# Altium PCB PCB1.PcbDoc
Units mm, origin at the board's own origin, x right, y up, seen from the top; angles counter-clockwise.
Board outline 92.96 x 68.33 mm, 4 copper layers (Top Layer, GND_PLANE, PWR_PLANE, Bottom Layer), stack 1.5 mm thick; 71 components, 41 nets, 249 pads, 0 vias.
Unrouted connection lines stored in the file: 160.
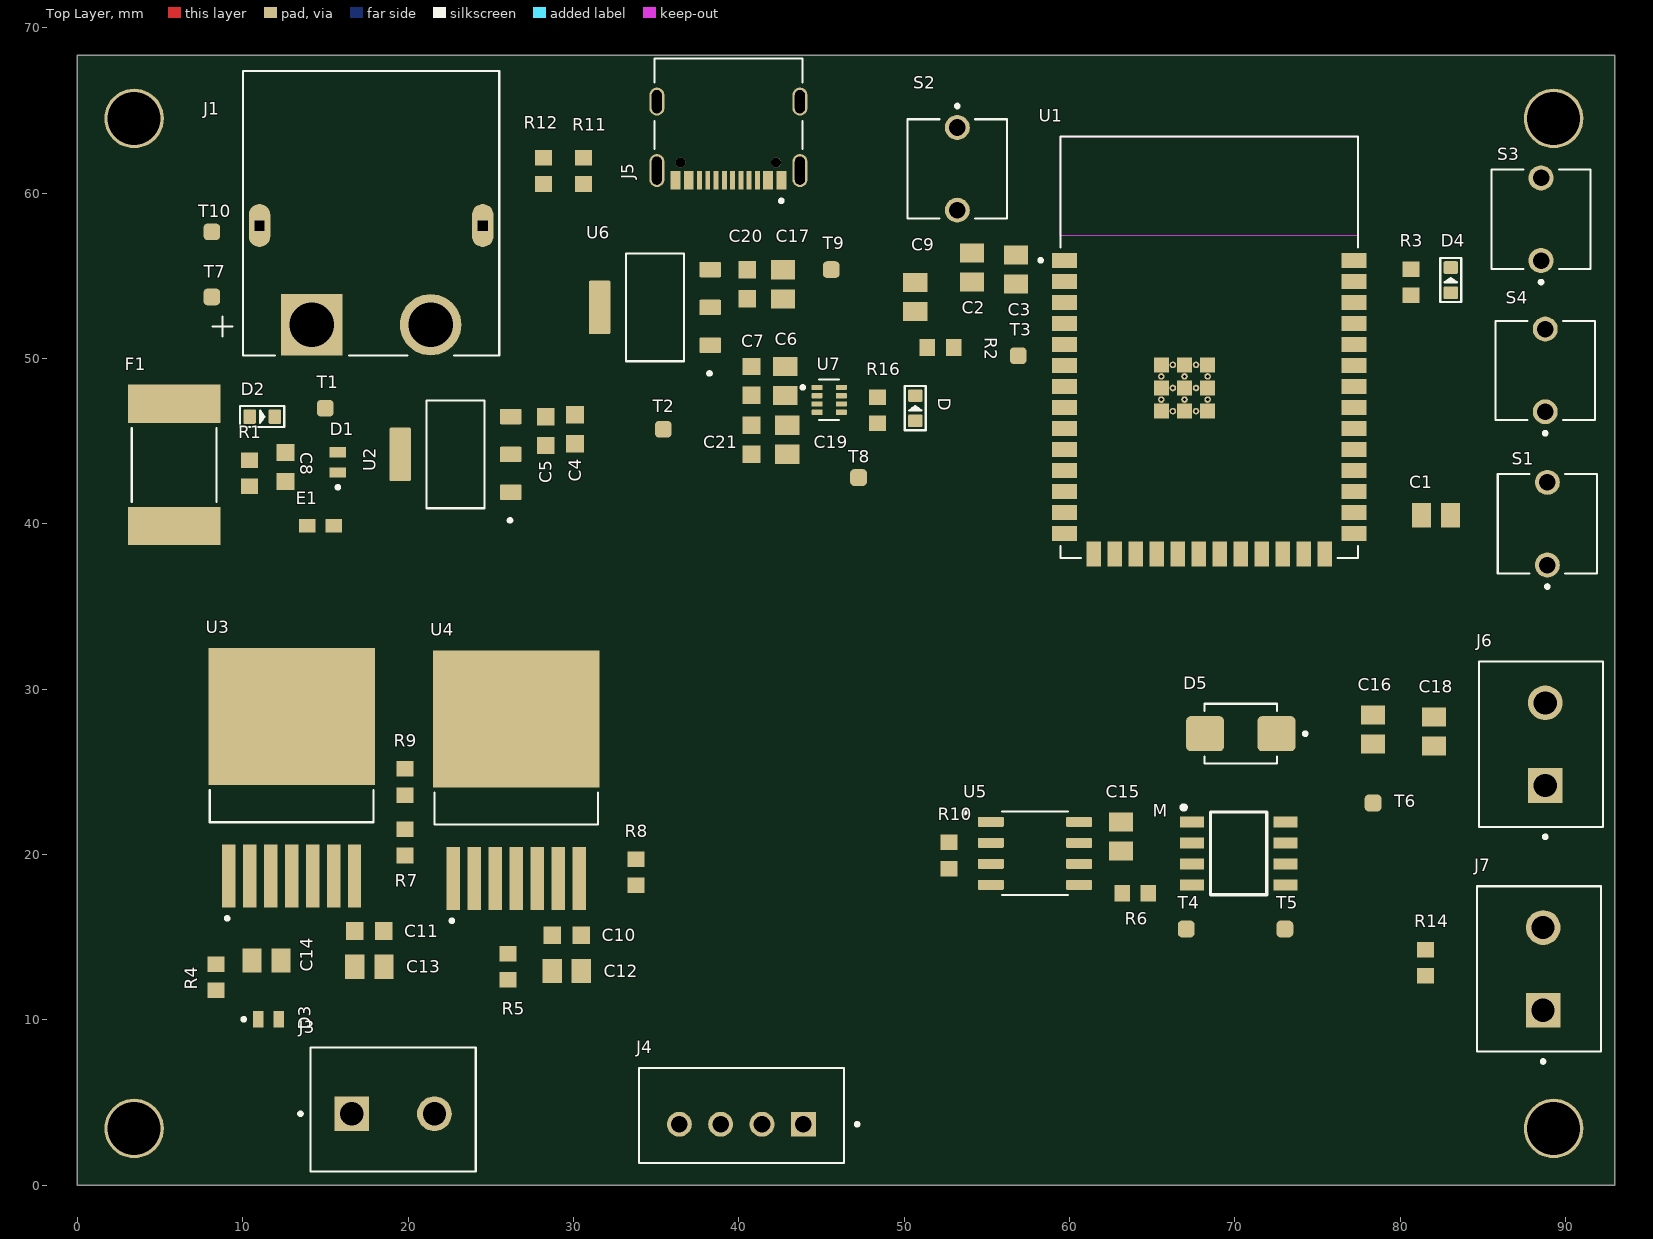
[diagram p0: Top Layer view]
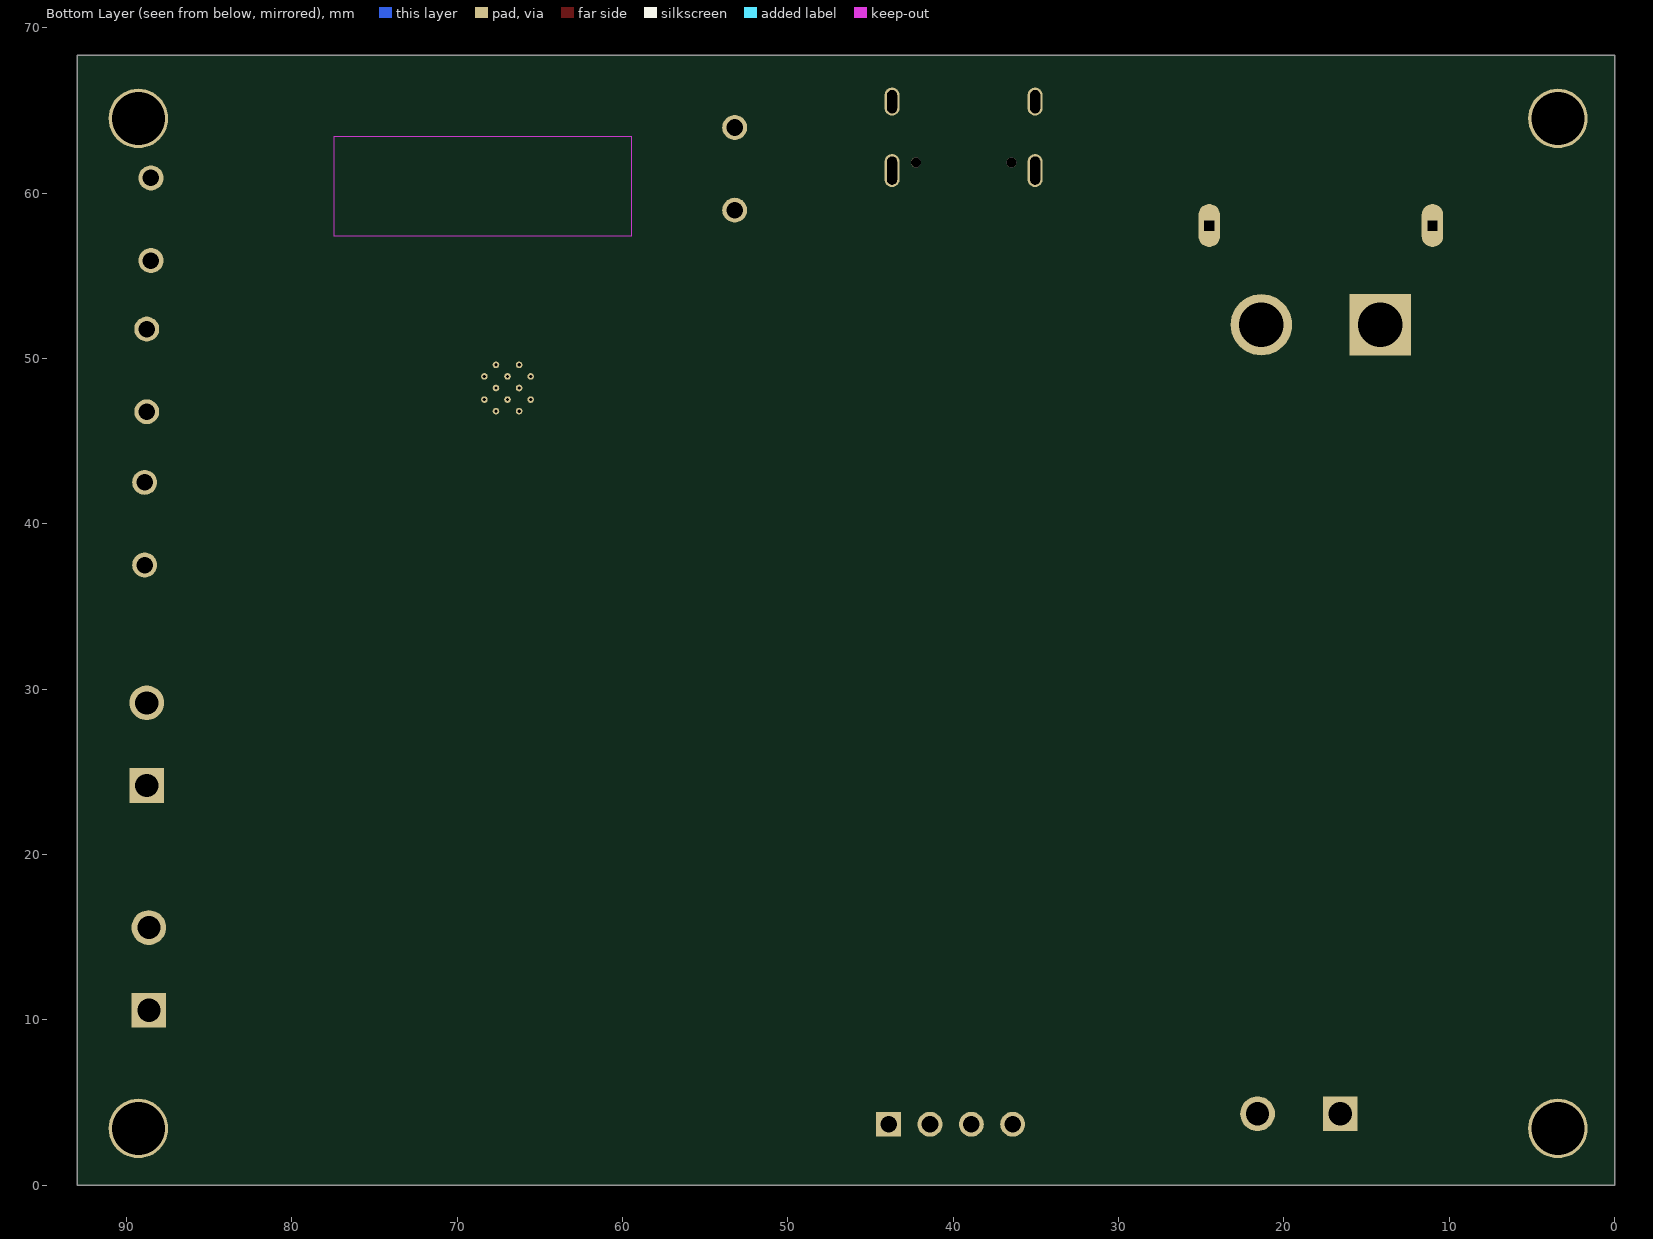
[diagram p1: Bottom Layer view, seen from below]
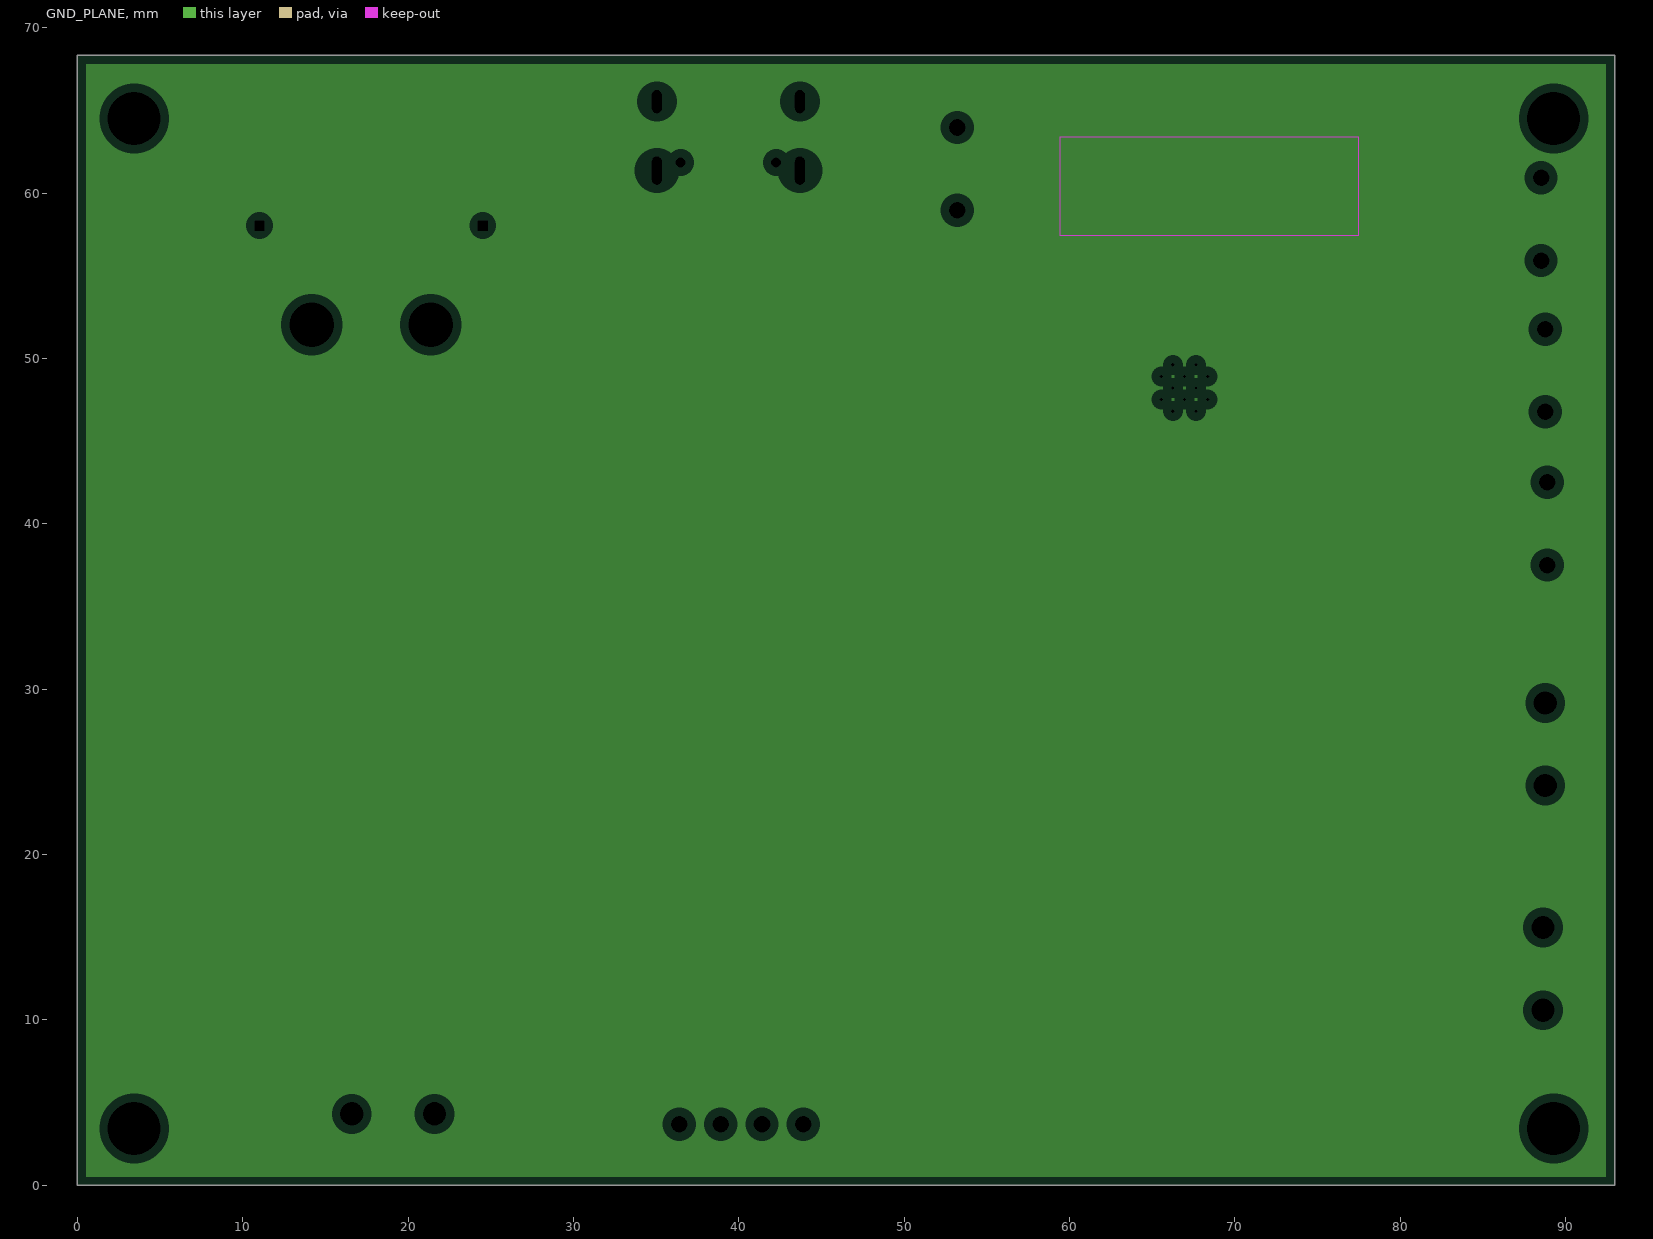
[diagram p2: GND_PLANE, clearances drawn from the general rule]
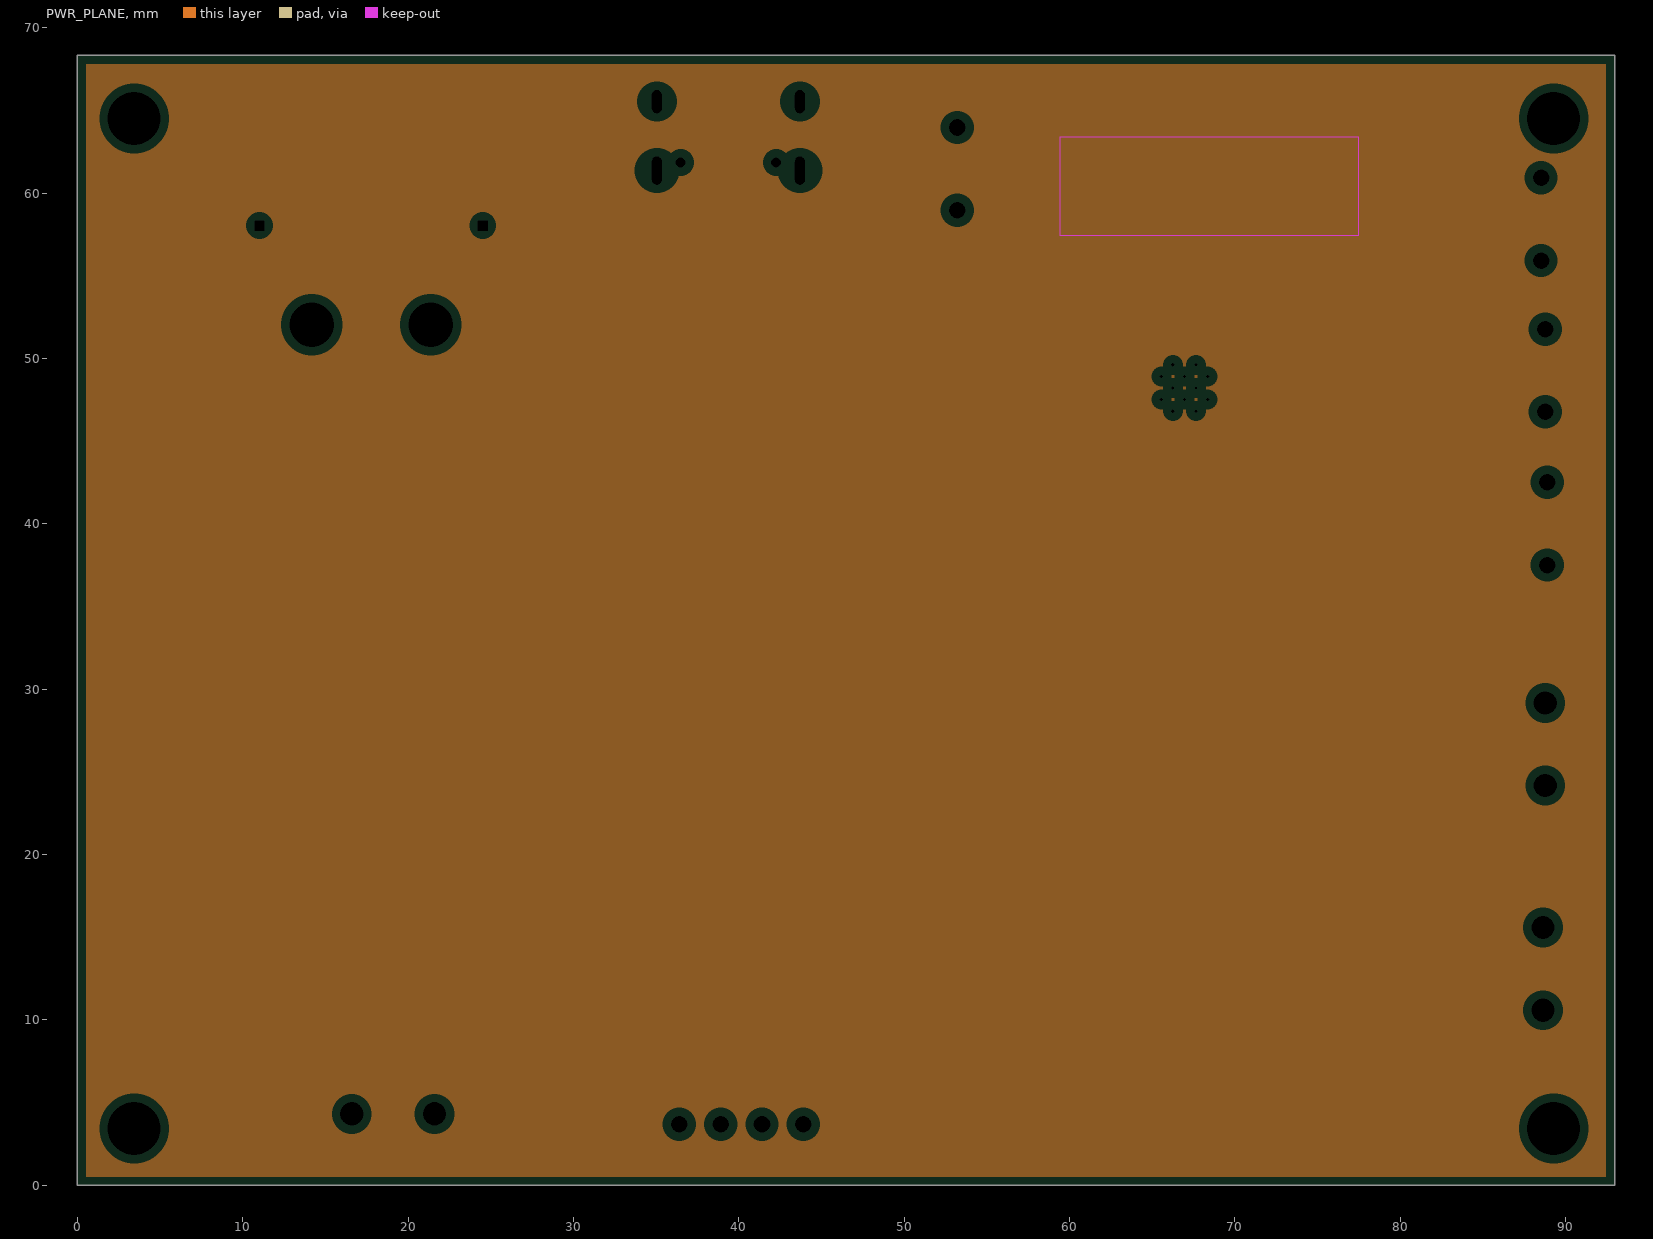
[diagram p3: PWR_PLANE, clearances drawn from the general rule]

## Layer stack, top to bottom
Top Solder: solder mask 0.0102, Solder Resist, Dk 3.5
Top Layer: signal copper 0.035
Dielectric 1: prepreg 0.18, PP-006, Dk 4.1
GND_PLANE: plane copper 0.035
Dielectric: core 1, FR-4, Dk 4.5
PWR_PLANE: plane copper 0.035
Dielectric 2: prepreg 0.18, PP-006, Dk 4.1
Bottom Layer: signal copper 0.035
Bottom Solder: solder mask 0.0102, Solder Resist, Dk 3.5

## Board outline
0,0 92.964,0 92.964,68.326 0,68.326

## Design rules (kind name [scope] priority, off if disabled: settings)
Clearance CLR_USB [InNetClass('USB_DIFF')] p1: gap=0.15 ignorepadtopadclearanceinfootprint=FALSE
Clearance CLR_RF [InNetClass('ANALOG_RF')] p2: gap=0.3 ignorepadtopadclearanceinfootprint=FALSE
Clearance CLR_HIGH_CURRENT [InNetClass('HIGH_CURRENT')] p3: gap=0.5 ignorepadtopadclearanceinfootprint=FALSE
Clearance CLR_GLOBAL [All] p4: gap=0.15 ignorepadtopadclearanceinfootprint=FALSE
DiffPairsRouting [InDifferentialPair('USB_D')] p1: maxlimit=0.254 minlimit=0.1 mostfreqgap=0.16 toplayer_minwidth=0.1 toplayer_maxwidth=0.381 toplayer_prefwidth=0.18 bottomlayer_minwidth=0.1 bottomlayer_maxwidth=0.381 bottomlayer_prefwidth=0.18 maxuncoupledlength=3
HoleSize [All] p1: absolutevalues=TRUE maxlimit=2.54 minlimit=0.2 maxpercent=80.000 minpercent=20.000
MatchedLengths USB_MATCH [InDifferentialPair('USB_D')] p1: tolerance=0.5 checknetsindiffpair=FALSE checkdiffpairvsdiffpair=TRUE checkxsignals=TRUE checkothers=TRUE
PlaneClearance [All] p1: clearance=0.508
PlaneConnect [All] p1: planeconnectstyle=Relief reliefexpansion=0.508 reliefentries=4 reliefconductorwidth=0.254 reliefairgap=0.254
PolygonConnect POWER_3V3_PGN [InNetClass('POWER_3V3')] p1: connectstyle=Relief reliefconductorwidth=0.254 reliefentries=4 polygonreliefangle="90 Angle" airgapwidth=0.254
PolygonConnect HIGH_CURRENT_PGN [InNetClass('HIGH_CURRENT')] p2: connectstyle=Direct reliefconductorwidth=0.254 reliefentries=4 polygonreliefangle="90 Angle" airgapwidth=0.254
RoutingVias RF_VIA [InNetClass('ANALOG_RF')] p1: holewidth=0.25 width=0.5 viastyle="Through Hole" minholewidth=0.2 minwidth=0.4 maxholewidth=0.35 maxwidth=0.7
RoutingVias POWER_VIA [InNetClass('HIGH_CURRENT')] p2: holewidth=0.4 width=0.8 viastyle="Through Hole" minholewidth=0.35 minwidth=0.65 maxholewidth=0.6 maxwidth=1
RoutingVias SIGNAL_VIA [All] p3: holewidth=0.2 width=0.45 viastyle="Through Hole" minholewidth=0.15 minwidth=0.4 maxholewidth=0.35 maxwidth=0.7
SilkToSolderMaskClearance [IsPad] p1: minsilkscreentomaskgap=0.2 clearancetoexposedcopper=TRUE
SolderMaskExpansion [All] p1: expansion=0.102 istentingtop=FALSE
SupplyNets "Schematic Supply Nets_4" [InNet('+12V_MAIN')] p1: voltage=0.000
SupplyNets "Schematic Supply Nets_3" [InNet('3V3_USB')] p2: voltage=0.000
SupplyNets "Schematic Supply Nets_2" [InNet('3V3')] p3: voltage=0.000
SupplyNets "Schematic Supply Nets_1" [InNet('GND')] p4: voltage=0.000
SupplyNets "Schematic Supply Nets" [InNet('3V3_BAT')] p5: voltage=0.000
UnpouredPolygon [InNetClass('All Nets')] p1:
Width USB_DIFF_WIDTH [InNetClass('USB_DIFF')] p1: maxlimit=0.22 minlimit=0.16 preferedwidth=0.18
Width ANALOG_RF_WIDTH [InNetClass('ANALOG_RF')] p2: maxlimit=0.6 minlimit=0.25 preferedwidth=0.35
Width DIGITAL_IO_WIDTH [InNetClass('DIGITAL_IO')] p3: maxlimit=0.4 minlimit=0.15 preferedwidth=0.2
Width CONTROL_PWM_WIDTH [InNetClass('CONTROL_PWM')] p4: maxlimit=0.5 minlimit=0.2 preferedwidth=0.254
Width POWER_3V3_WIDTH [InNetClass('POWER_3V3')] p5: maxlimit=1.2 minlimit=0.4 preferedwidth=0.8
Width WIDTH_HIGH_CURRENT [InNetClass('HIGH_CURRENT')] p6: maxlimit=10 minlimit=2.5 preferedwidth=4
24 further rules are at their usual default settings.

## Classes and differential pairs
differential pair USB_D: +USB_D_P -USB_D_N

## Components (designator, comment, footprint, x,y, rotation, side; value= is the part's Value field where it differs from the comment)
C1 "100nF" SMD_Ceramic_CAP 82.169,40.513 r180 top
C2 "100nF" SMD_Ceramic_CAP 54.102,55.499 r270 top
C3 "100nF" SMD_Ceramic_CAP 56.769,55.381 r270 top
C4 "10uF" Capacitor_Bipolar-SMD 30.099,45.72 r270 top
C5 "470uF" Capacitor_Bipolar-SMD 28.321,45.607 r270 top
C6 "100nF" SMD_Ceramic_CAP 42.799,48.641 r270 top
C7 "10uF" Capacitor_Bipolar-SMD 40.767,48.641 r90 top
C8 "100uF" Capacitor_Bipolar-SMD 12.573,43.434 r90 top
C9 "100nF" SMD_Ceramic_CAP 50.673,53.721 r270 top
C10 "1000uF" Capacitor_Bipolar-SMD 29.591,15.113 r180 top
C11 "1000uF" Capacitor_Bipolar-SMD 17.653,15.367 r0 top
C12 "100nF" SMD_Ceramic_CAP 29.591,12.954 r180 top
C13 "100nF" SMD_Ceramic_CAP 17.653,13.208 r0 top
C14 "100nF" SMD_Ceramic_CAP 11.43,13.589 r0 top
C15 "100nF" SMD_Ceramic_CAP 63.119,21.082 r90 top
C16 "100pF" SMD_Ceramic_CAP 78.359,27.559 r90 top
C17 "100nF" SMD_Ceramic_CAP 42.672,54.483 r90 top
C18 "10nF" SMD_Ceramic_CAP 82.042,27.441 r270 top
C19 "100nF" SMD_Ceramic_CAP 42.926,45.085 r90 top
C20 "10uF" Capacitor_Bipolar-SMD 40.513,54.483 r270 top
C21 "10uF" Capacitor_Bipolar-SMD 40.767,45.085 r270 top
D "PWR_ST" LED-0603 50.673,46.99 r90 top
D1 "TVS_15V" TVS_15V 15.748,43.71 r90 top
D2 "BAT_STATUS" LED-0603 11.176,46.482 r0 top
D3 "TVS_15V" TVS_15V 11.557,10.033 r0 top
D4 "LED1_Status" LED-0603 83.058,54.737 r90 top
D5 "SS24" SS24 70.358,27.305 r180 top
E1 "Ferrite_Bead" Ferrite_bead 14.694,39.878 r0 top
F1 "Polyfuse" Polyfuse 5.842,43.561 r90 top
J1 "XT60PW-F" XT60PW-F 17.761,52.039 r180 top
J3 "LF Coil Connector" 2_Pin_Terminal_Block 19.09,4.318 r0 top
J4 "UART2" JST_XH_Balance 40.152,4.208 r0 top
J5 "TYPE-C-31-M-12" HRO_TYPE-C-31-M-12 39.37,65.532 r180 top
J6 "Antenna" 2_Pin_Terminal_Block 88.773,26.67 r90 top
J7 "HF_OUT" 2_Pin_Terminal_Block 88.646,13.081 r90 top
M "IRF7470" IRF7470 70.231,20.066 r0 top
R1 "1k" Resistor_SMD 10.414,43.053 r90 top
R2 "10k" Resistor_SMD 52.197,50.673 r180 top
R3 "220" Resistor_SMD 80.645,54.61 r90 top
R4 "10" Resistor_SMD 8.382,12.573 r90 top
R5 "10k" Resistor_SMD 26.035,13.208 r90 top
R6 "10" Resistor_SMD 63.98,17.653 r0 top
R7 "1k" Resistor_SMD 19.812,20.729 r90 top
R8 "1k" Resistor_SMD 33.782,18.923 r90 top
R9 "10k" Resistor_SMD 19.812,24.384 r90 top
R10 "100" Resistor_SMD 52.705,19.939 r90 top
R11 "5.1k" Resistor_SMD 30.607,61.341 r270 top
R12 "5.1k" Resistor_SMD 28.194,61.341 r270 top
R14 "10" Resistor_SMD 81.534,13.462 r270 top
R16 "1k" Resistor_SMD 48.387,46.863 r270 top
S1 "SW1" SW_BUTT-2 88.9,40.005 r90 top
S2 "SW2" SW_BUTT-2 53.213,61.468 r270 top
S3 "BUTT-2" SW_BUTT-2 88.519,58.42 r90 top
S4 "BUTT-2" SW_BUTT-2 88.773,49.276 r90 top
T1 "Test_Point" Test_Point 14.986,46.101 r0 top
T2 "Test_Point" Test_Point 35.433,44.831 r0 top
T3 "Test_Point" Test_Point 56.896,49.276 r0 top
T4 "Test_Point" Test_Point 67.056,14.605 r0 top
T5 "Test_Point" Test_Point 73.025,14.605 r0 top
T6 "Test_Point" Test_Point 78.359,22.225 r0 top
T7 "Test_Point" Test_Point 8.128,52.832 r0 top
T8 "Test_Point" Test_Point 47.244,41.91 r0 top
T9 "Test_Point" Test_Point 45.593,54.483 r0 top
T10 "Test_Point" Test_Point 9.017,57.658 r90 top
U1 "ESP32-S3-WROOM-1-N16R2" ESP32-S3-WROOM-1-N16R2 68.453,50.673 r0 top
U2 "AMS1117-3.3" AMS1117-5.0 22.86,44.196 r90 top
U3 "BTS7960B" BTS7960B 12.954,24.638 r90 top
U4 "BTS7960B" BTS7960B 26.543,24.492 r90 top
U5 "TC4420COA" TC4420COA 57.912,20.066 r0 top
U6 "AMS1117-3.3" AMS1117-5.0 34.925,53.086 r90 top
U7 "TPS2116DRLR" TPS2116 45.466,47.498 r0 top

## Footprints (in the part's own frame and the unit in brackets; to place one, negate y for a bottom-side part, rotate by r counter-clockwise, add the part's x,y. Pads: shape width x height; smd on the part's side, far side on the other; paste and mask are expansions set on the pad)
2_Pin_Terminal_Block [mm]
  rect 2.1x2.1 / inner round 2.1 / far side rect 2.1x2.1 hole 1.4: 1(-2.5,0)
  round 2.1 hole 1.4: 2(2.5,0)
  silkscreen extent -5.7,-3.5 5,4, body extent -5.6,-3.75 5,3.75, height 10
AMS1117-5.0 [mm]
  rrect15% 0.93x1.31 smd: 1(-2.29,-3.345) 2(0,-3.345) 3(2.29,-3.345)
  rrect15% 3.24x1.31 smd: 4(0,3.345)
  silkscreen extent -4.09,-3.4 3.25,1.75, body extent -3.25,-3.5 3.25,3.5, height 1.8
BTS7960B [mm]
  rect 3.81x0.8 smd: 1(-5.95,3.81) 2(-5.95,2.54) 3(-5.95,1.27) 4(-5.95,0) 5(-5.95,-1.27) 6(-5.95,-2.54) 7(-5.95,-3.81)
  rect 8.29x10.07 smd paste-6: 8(3.71,0)
  silkscreen extent -8.6,-4.95 -0.75,4.95, body extent -7.45,-4.95 7.45,4.95, height 4.4
Capacitor_Bipolar-SMD [mm]
  rect 1.05x1.08 smd: 1(-0.875,0) 2(0.875,0)
ESP32-S3-WROOM-1-N16R2 [mm]
  rect 1.5x0.9 smd: 2(-8.75,3.99) 3(-8.75,2.72) 4(-8.75,1.45) 5(-8.75,0.18) 6(-8.75,-1.09) 7(-8.75,-2.36) 8(-8.75,-3.63) 9(-8.75,-4.9) 10(-8.75,-6.17) 11(-8.75,-7.44) 12(-8.75,-8.71) 13(-8.75,-9.98) 14(-8.75,-11.25) 27(8.75,-11.25) 28(8.75,-9.98) 29(8.75,-8.71) 30(8.75,-7.44) 31(8.75,-6.17) 32(8.75,-4.9) 33(8.75,-3.63) 34(8.75,-2.36) 35(8.75,-1.09) 36(8.75,0.18) 37(8.75,1.45) 38(8.75,2.72) 39(8.75,3.99) GND(-8.75,5.26) GND(8.75,5.26)
  rect 0.9x1.5 smd: 15(-6.985,-12.5) 16(-5.715,-12.5) 17(-4.445,-12.5) 18(-3.175,-12.5) 19(-1.905,-12.5) 20(-0.635,-12.5) 21(0.635,-12.5) 22(1.905,-12.5) 23(3.175,-12.5) 24(4.445,-12.5) 25(5.715,-12.5) 26(6.985,-12.5)
  round 0.4 hole 0.2 mask+0: 41_10(-1.5,-1.76) 41_11(-2.9,-1.76) 41_12(-0.1,-1.76) 41_13(-2.9,-3.16) 41_14(-1.5,-3.16) 41_15(-0.1,-3.16) 41_16(-2.2,-1.06) 41_17(-0.8,-1.06) 41_18(-2.2,-2.46) 41_19(-0.8,-2.46) 41_20(-2.2,-3.86) 41_21(-0.8,-3.86)
  rect 0.9x0.9 smd: GND(-2.9,-3.86) GND(-2.9,-2.46) GND(-2.9,-1.06) GND(-1.5,-3.86) GND(-1.5,-2.46) GND(-1.5,-1.06) GND(-0.1,-3.86) GND(-0.1,-2.46) GND(-0.1,-1.06)
  Keep-Out Layer region: 9,6.75 -9,6.75 -9,12.75 9,12.75
  Keep-Out Layer region: 9,6.75 -9,6.75 -9,12.75 9,12.75
  silkscreen extent -10.3,-12.75 9,12.75, body extent -9,-12.75 9,12.75, height 3.25
Ferrite_bead [mm]
  rect 1x0.8 smd: 1(-0.8,0) 2(0.8,0)
  body extent -0.8,-0.4 0.8,0.4, height 0.95
HRO_TYPE-C-31-M-12 [mm]
  rect 0.6x1.14 smd mask+0.05: A1_B12(-3.2,4.75) A4_B9(-2.4,4.75) B1_A12(3.2,4.75) B4_A9(2.4,4.75)
  rect 0.3x1.14 smd mask+0.05: A5(-1.25,4.75) A6(-0.25,4.75) A7(0.25,4.75) A8(1.25,4.75) B5(1.75,4.75) B6(0.75,4.75) B7(-0.75,4.75) B8(-1.75,4.75)
  oval 0.9x2 hole 0.6 slot 1.7 at 90 deg: S1(-4.325,4.17) S2(4.325,4.17)
  oval 0.9x1.7 hole 0.6 slot 1.4 at 90 deg: S3(-4.325,0) S4(4.325,0)
  round 0.6 hole 0.6 unplated: ""(-2.89,3.68) ""(2.89,3.68)
  silkscreen extent -4.47,-2.6 4.47,6.1, body extent -4.47,-2.6 4.47,5.31, height 3.31
IRF7470 [mm]
  rect 1.45x0.65 smd paste+0 mask+0.102: 1(-2.825,1.905) 2(-2.825,0.635) 3(-2.825,-0.635) 4(-2.825,-1.905) 5(2.825,-1.905) 6(2.825,-0.635) 7(2.825,0.635) 8(2.825,1.905)
  silkscreen extent -3.45,-2.5 1.7,2.9
JST_XH_Balance [mm]
  rect 1.508x1.508 / inner round 1.508 / far side rect 1.508x1.508 hole 1: 1(3.75,-0.525)
  round 1.508 hole 1: 2(1.25,-0.525) 3(-1.25,-0.525) 4(-3.75,-0.525)
  silkscreen extent -6.2,-2.88 7.1,2.88, body extent -6.2,-2.88 6.2,2.88, height 7
LED-0603 [mil]
  rrect25% 30x35 smd: NEG(30,0) POS(-30,0)
  silkscreen extent -52,-25 52,25
Polyfuse [mm]
  rect 2.3x5.6 smd paste+0 mask+0.102: 1(-3.7,0) 2(3.7,0)
  silkscreen extent -2.23,-2.56 2.23,2.56
Resistor_SMD [mm]
  rect 0.94x1.02 smd: 1(-0.79,0) 2(0.79,0)
  body extent -0.8,-0.4 0.8,0.4, height 0.5
SMD_Ceramic_CAP [mm]
  rect 1.16x1.47 smd: 1(-0.88,0) 2(0.88,0)
  body extent -1,-0.63 1,0.63, height 0.94
SS24 [mm]
  rrect25% 2.29x2.12 smd: A(2.16,0) C(-2.16,0)
  silkscreen extent -4,-1.81 2.2,1.81, body extent -2.67,-1.81 2.67,1.81, height 2.65
SW_BUTT-2 [mm]
  round 1.508 hole 1 mask+0.102: 1(-2.5,0) 2(2.5,0)
  silkscreen extent -3.9,-3 3,3, body extent -3,-3 3,3, height 5.1
TC4420COA [mm]
  rrect25% 1.58x0.6 smd: 1(-2.67,1.905) 2(-2.67,0.635) 3(-2.67,-0.635) 4(-2.67,-1.905) 5(2.67,-1.905) 6(2.67,-0.635) 7(2.67,0.635) 8(2.67,1.905)
  silkscreen extent -4.35,-2.52 1.99,2.6, body extent -3,-2.45 3,2.45, height 1.75
Test_Point [mil]
  rrect50% 40x40 smd: 1(0,35)
TPS2116 [mm]
  rrect25% 0.66x0.32 smd: 1(-0.735,0.75) 2(-0.735,0.25) 3(-0.735,-0.25) 4(-0.735,-0.75) 5(0.735,-0.75) 6(0.735,-0.25) 7(0.735,0.25) 8(0.735,0.75)
  silkscreen extent -1.7,-1.23 0.6,1.23, body extent -0.8,-1.05 0.8,1.05, height 0.6
TVS_15V [mm]
  rect 0.625x1 smd paste-1: A(0.613,0) K(-0.613,0)
  silkscreen extent -1.6,-0.1 -1.4,0.1, body extent -0.8,-0.5 0.8,0.5, height 0.55
XT60PW-F [mm]
  rect 3.716x3.716 / inner round 3.716 / far side rect 3.716x3.716 hole 2.7 mask+0.102: 1(3.6,0)
  round 3.716 hole 2.7 mask+0.102: 2(-3.6,0)
  oval 1.3x2.6 hole 0.6 square mask+0.102: SH1(-6.75,-6) SH2(6.75,-6)
  silkscreen extent -7.75,-15.35 9.6,1.85, body extent -7.75,-15.35 7.75,1.85, height 8.4

## Part data
C1 C2 C3 C6 C9 C12 C13 C14 C15 C16 C17 C18 C19: library part SMD_Ceramic_CAP, "10000 pF Â±5% 16V Ceramic Capacitor X7R 0805 (2012 Metric)", Package="2012 AVX", Check_prices=https://www.snapeda.com/parts/0805YC103J4T2A/AVX/view-part/?ref=eda, MF=AVX, MP=0805YC103J4T2A, SnapEDA_Link=https://www.snapeda.com/parts/0805YC103J4T2A/AVX/view-part/?ref=snap
C4 C5 C7 C8 C10 C11 C20 C21: library part CAPACITOR, "<B>CAPACITOR</B>, American symbol", Package=None, Availability=Unavailable, MP=CAPACITOR, Price=None
D D2 D4: library part SMD-LED(0603), "Blue LED Indication - Discrete 2.8V 0603 _1608 Metric_", Package="0603 Everlight", Availability=Unavailable, MF=Everlight, MP=19-217/BHC-ZL1M2RY/3T, Price=None, SnapEDA_Link=https://www.snapeda.com/parts/19-217/BHC-ZL1M2RY/3T/Everlight%20Electronics%20Co%20Ltd/view-part/105869/?ref=snap
D1 D3: "15V Clamp 80A Ipp Tvs Diode Surface Mount SGP1610N2", Package="UDFN-2 Semtech", Check_prices=https://www.snapeda.com/parts/UCLAMP0571P.TNT/Semtech+Corporation/view-part/?ref=eda, MF="Semtech Corporation", MP=UCLAMP0571P.TNT, SnapEDA_Link=https://www.snapeda.com/parts/UCLAMP0571P.TNT/Semtech+Corporation/view-part/?ref=snap
D5: "Diode Schottky 40V 2A Surface Mount DO-214AA (SMB)", Package="DO-214AA ON Semiconductor", Availability="In Stock", Check_prices=https://www.snapeda.com/parts/SS24/Onsemi/view-part/?ref=eda, MF="ON Semiconductor", MP=SS24, Price=None, SnapEDA_Link=https://www.snapeda.com/parts/SS24/Onsemi/view-part/?ref=snap
E1: "120 Ohms @ 100 MHz 1 Power, Signal Line Ferrite Bead 0603 (1608 Metric) 700mA 200mOhm", Package="0603 Laird", Availability="In Stock", Check_prices=https://www.snapeda.com/parts/LI0603G121R-10/Laird/view-part/?ref=eda, MF=Laird, MP=LI0603G121R-10, Price=None, Purchase-URL=https://pricing.snapeda.com/search/part/LI0603G121R-10/?ref=eda, SnapEDA_Link=https://www.snapeda.com/parts/LI0603G121R-10/Laird/view-part/?ref=snap
J1: "Connector: DC supply; socket; female; XT60; 30A; 500V; PIN: 2; THT", Package=Package, Check_prices=https://www.snapeda.com/parts/XT60PW-F/AMASS/view-part/?ref=eda, MF=AMASS, MP=XT60PW-F, SnapEDA_Link=https://www.snapeda.com/parts/XT60PW-F/AMASS/view-part/?ref=snap
J3 J6 J7: library part 2_Pin_Terminal_Block, "2 Pin Terminal Block 5mm Pitch", Package=None, Check_prices=https://www.snapeda.com/parts/KF301-2P/Handson+Technology/view-part/?ref=eda, MF="Handson Technology", MP=KF301-2P, SnapEDA_Link=https://www.snapeda.com/parts/KF301-2P/Handson+Technology/view-part/?ref=snap
J4: library part 4_pin_header, "MTA-100 HEADER - TIN, 04P MTA100 HDR ASSY SQ R/A POL", Package=None, Check_prices=https://www.snapeda.com/parts/640455-4/TE+Connectivity+AMP+Connectors/view-part/?ref=eda, MF="TE Connectivity", MP=640455-4, SnapEDA_Link=https://www.snapeda.com/parts/640455-4/TE+Connectivity+AMP+Connectors/view-part/?ref=snap
J5: "USB Connectors 24 Receptacle 1 8.94*7.3mm RoHS", Package=Package, Check_prices=https://www.snapeda.com/parts/TYPE-C-31-M-12/HRO+Electronics+Co.%252C+Ltd./view-part/?ref=eda, MF="HRO Electronics Co., Ltd.", MP=TYPE-C-31-M-12, SnapEDA_Link=https://www.snapeda.com/parts/TYPE-C-31-M-12/HRO+Electronics+Co.%252C+Ltd./view-part/?ref=snap
R1: library part Resisto_SMD, "1 kOhms Â±0.5% 0.063W, 1/16W Chip Resistor 0603 (1608 Metric) - Thin Film", Package="1608 Susumu", Check_prices=https://www.snapeda.com/parts/RR0816P-102-D/Susumu/view-part/?ref=eda, MF=Susumu, MP=RR0816P-102-D, SnapEDA_Link=https://www.snapeda.com/parts/RR0816P-102-D/Susumu/view-part/?ref=snap
R2 R3 R4 R5 R6 R7 R8 R9 R10 R11 R12 R14 R16: library part Resistor_SMD, "1 kOhms Â±0.5% 0.063W, 1/16W Chip Resistor 0603 (1608 Metric) - Thin Film", Package="1608 Susumu", Check_prices=https://www.snapeda.com/parts/RR0816P-102-D/Susumu/view-part/?ref=eda, MF=Susumu, MP=RR0816P-102-D, SnapEDA_Link=https://www.snapeda.com/parts/RR0816P-102-D/Susumu/view-part/?ref=snap
S1 S2: library part BUTT-2, "Tactile Switches MINI PUSH BUTTON SWITCH 2-PIN QTY. 4", Package=None, Check_prices=https://www.snapeda.com/parts/BUTT-2/Gravitech/view-part/?ref=eda, MF=Gravitech, MP=BUTT-2, SnapEDA_Link=https://www.snapeda.com/parts/BUTT-2/Gravitech/view-part/?ref=snap
S3 S4: "Tactile Switches MINI PUSH BUTTON SWITCH 2-PIN QTY. 4", Package=None, Check_prices=https://www.snapeda.com/parts/BUTT-2/Gravitech/view-part/?ref=eda, MF=Gravitech, MP=BUTT-2, SnapEDA_Link=https://www.snapeda.com/parts/BUTT-2/Gravitech/view-part/?ref=snap
U1: "Bluetooth, WiFi 802.11b/g/n, Bluetooth v5.0 Transceiver Module 2.4GHz PCB Trace Surface Mount", Package="NON STANDARD Espressif Systems", Check_prices=https://www.snapeda.com/parts/ESP32S3WROOM1N16R2/Espressif+Systems/view-part/?ref=eda, MF="Espressif Systems", MP=ESP32S3WROOM1N16R2, SnapEDA_Link=https://www.snapeda.com/parts/ESP32S3WROOM1N16R2/Espressif+Systems/view-part/?ref=snap
U2 U6: library part AMS1117-5.0, "1A LOW DROPOUT VOLTAGE REGULATOR", Package="SOT-223 Seeed Technology", Availability="Not in stock", Check_prices=https://www.snapeda.com/parts/AMS1117-5.0/ams/view-part/?ref=eda, MF=ams, MP=AMS1117-5.0, Price=None, SnapEDA_Link=https://www.snapeda.com/parts/AMS1117-5.0/ams/view-part/?ref=snap
U3 U4: "Half Bridge Driver DC Motors, General Purpose DMOS PG-TO263-7-1", Package="TO-263 Infineon", Check_prices=https://www.snapeda.com/parts/BTS7960B/Infineon/view-part/?ref=eda, MF=Infineon, MP=BTS7960B, SnapEDA_Link=https://www.snapeda.com/parts/BTS7960B/Infineon/view-part/?ref=snap
U5: "Microchip TC4420COA,MOSFET Power Driver 6A,4.5 to 18V,Non-Inverting,8-Pin SOIC", Package="SOIC-8 Microchip", Check_prices=https://www.snapeda.com/parts/TC4420COA/Microchip/view-part/?ref=eda, MF="Microchip Technology", MP=TC4420COA, SnapEDA_Link=https://www.snapeda.com/parts/TC4420COA/Microchip/view-part/?ref=snap
U7: "1.6-V to 5.5-V, 40-mâ„", Package=None, Check_prices=https://www.snapeda.com/parts/TPS2116DRLR/Texas+Instruments/view-part/?ref=eda, MF="Texas Instruments", MP=TPS2116DRLR, SnapEDA_Link=https://www.snapeda.com/parts/TPS2116DRLR/Texas+Instruments/view-part/?ref=snap

## Free pads (board coordinates)
  round 3.6 hole 3.2: 2(3.429,64.516) 3(89.281,64.516) 4(89.281,3.429) 5(3.429,3.429)

## Nets (pads, with @x,y where several pads share a name; then routed paths per layer and width w, separated by ;. In a path a pad name is that pad's centre, name@x,y a point inside that pad or via, vN(x,y) a via of type N, cw(c..) or ccw(c..) an arc to the next point about the centre after c; other vN are vias at no path point)
3V3: C2.2 C3.2 J4.1 R2.1 R16.1 T3.1 U1.2 U7.2 U7.7
3V3_BAT: C6.2 C7.1 R1.1 T2.1 U2.2 U7.3
3V3_USB: C19.2 C21.1 T8.1 U6.2 U7.4 U7.6
+12V_MAIN: C4.1 C5.1 C10.1 C11.1 C12.1 C13.1 C15.2 E1.2 J6.2 T1.1 U2.3 U3.7 U4.7 U5.1 U5.8
BAT+: F1.2 J1.1 T7.1
Boot: C1.2 S1.2 U1.27
CC1: J5.A5 R12.2
CC2: J5.B5 R11.2
DC_BLOCKED: C16.1 C18.2 J6.1 T6.1
EN: C9.2 R2.2 S2.2 U1.3
Gate: M.4 R6.2 T4.1
GND: C1.1 C2.1 C3.1 C4.2 C5.2 C6.1 C7.2 C8.2 C9.1 C10.2 C11.2 C12.2 C13.2 C15.1 C16.2 C17.1 C19.1 C20.2 C21.2 D1.A D2.NEG D4.NEG D5.A J1.2 J1.SH1 J1.SH2 J4.4 J5.A1_B12 J5.B1_A12 J5.S1 J5.S2 J5.S3 J5.S4 J7.2 M.1 M.2 M.3 R5.1 R7.1 R8.1 R9.1 R11.1 R12.1 S1.1 S2.1 S3.2 S4.2 T10.1 U1.GND U2.1 U3.1 U4.1 U5.4 U5.5 U6.1 U7.1 U7.5
HF_OUT: J7.1 R14.2
IO2: R3.1 U1.38
IO14: S3.1 U1.22
IO15: S4.1 U1.8
IO21: R14.1 U1.23
IO35: R10.1 U1.28
IS_L: R8.2 U4.6
IS_R: R7.2 U3.6
LF_EN: U1.4 U3.3 U4.3
LF_LPWM: U1.7 U4.2
LF_OUT1: D3.K J3.1 R4.1 U3.4
LF_OUT2: C14.2 D3.A J3.2 U4.4
LF_RPWM: U1.6 U3.2
NetC8_1: C8.1 D1.K E1.1 F1.1
NetC14_1: C14.1 R4.2
NetD2_POS: D2.POS R1.2
NetD4_POS: D4.POS R3.2
NetD_POS: D.POS R16.2
NetR5_2: R5.2 U4.5
NetR9_2: R9.2 U3.5
NetR10_2: R10.2 U5.2
NFC_DRAIN: C18.1 D5.C M.5 M.6 M.7 M.8 T5.1
Output: R6.1 U5.6 U5.7
RXD2: J4.3 U1.11
ST: D.NEG U7.8
TXD2: J4.2 U1.10
USB_D_N: J5.A7 J5.B7 U1.13
USB_D_P: J5.A6 J5.B6 U1.14
VBUS: C17.2 C20.1 J5.A4_B9 J5.B4_A9 T9.1 U6.3
pads on no net: J5. J5.A8 J5.B8 U1.5 U1.9 U1.12 U1.15 U1.16 U1.17 U1.18 U1.19 U1.20 U1.21 U1.24 U1.25 U1.26 U1.29 U1.30 U1.31 U1.32 U1.33 U1.34 U1.35 U1.36 U1.37 U1.39 U1.41_10 U1.41_11 U1.41_12 U1.41_13 U1.41_14 U1.41_15 U1.41_16 U1.41_17 U1.41_18 U1.41_19 U1.41_20 U1.41_21 U2.4 U3.8 U4.8 U5.3 U6.4

## Polygon pours and split planes (outlines as drawn)
no net on GND_PLANE (split plane): 92.454,0.51 0.51,0.51 0.51,67.816 92.454,67.816
no net on PWR_PLANE (split plane): 92.454,0.51 0.51,0.51 0.51,67.816 92.454,67.816

## Text inside footprints (layer, text, board x,y; h text height)
J5: Mechanical 13 "PCB EDGE" at 34.17,67.432 h0.61 r180
U1: Mechanical 13 "ANTENNA" at 63.953,60.173 h1.27